# Altium PCB MPPT charger panel.PcbDoc
Units mm, origin at the board's own origin, x right, y up, seen from the top; angles counter-clockwise.
Board outline 76.45 x 131.7 mm, 2 copper layers (Top Layer, Bottom Layer); 9 components, 0 nets, 9 pads, 0 vias.
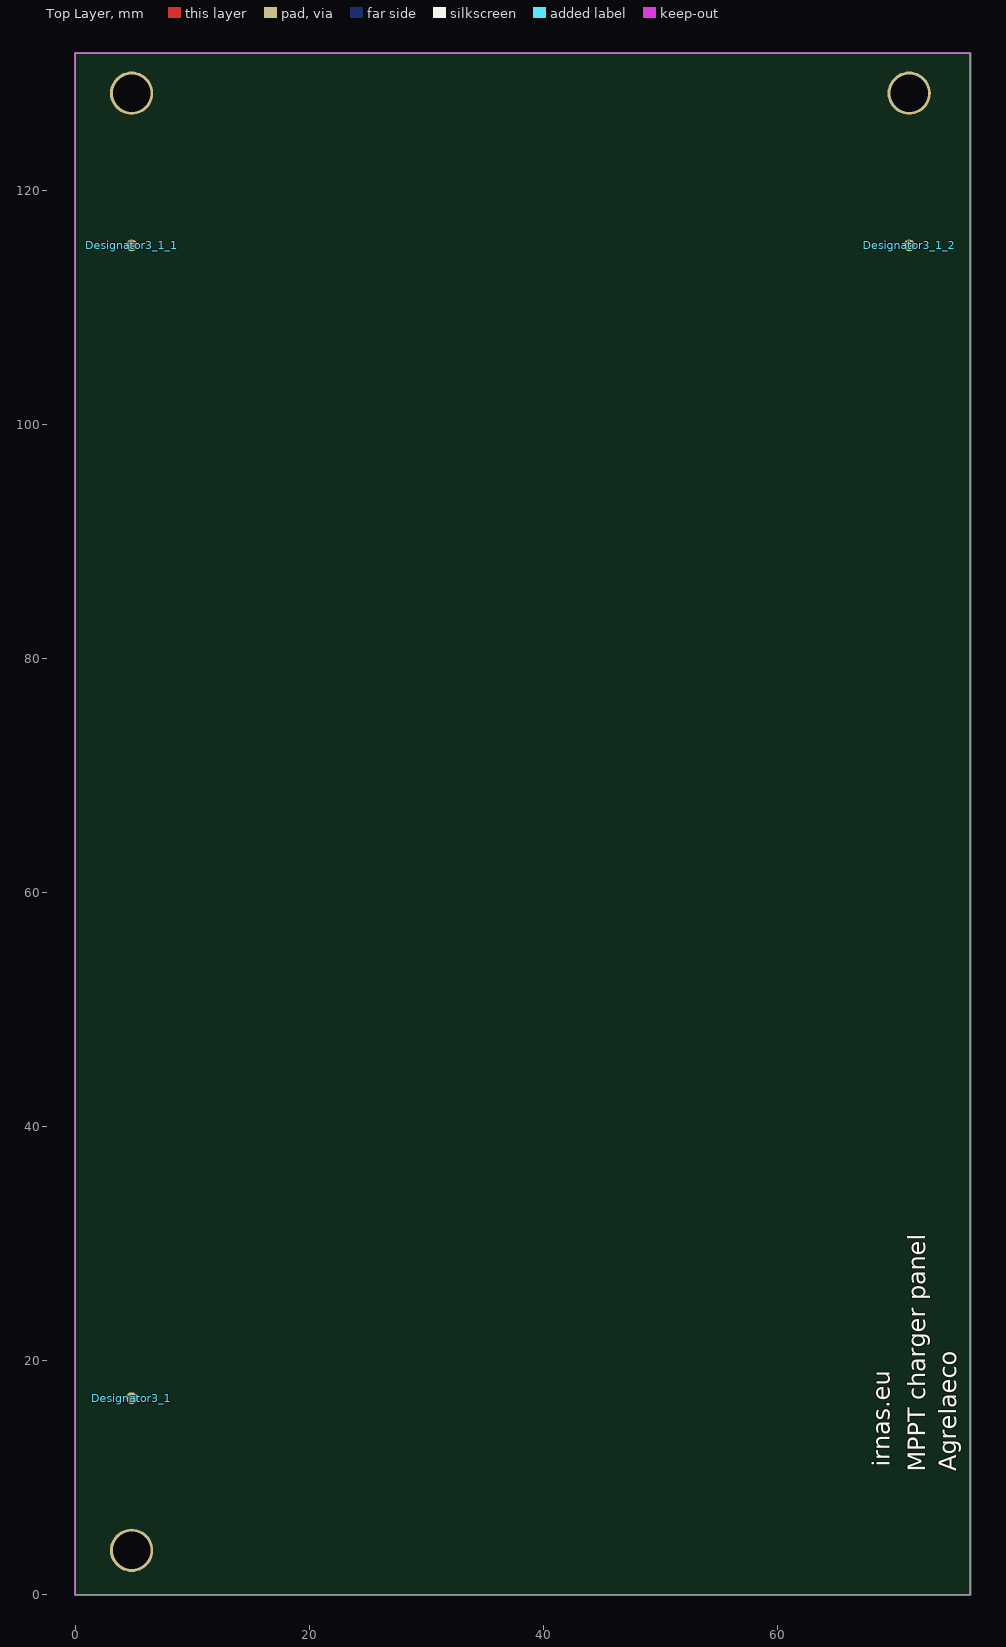
[diagram p0: Top Layer view]
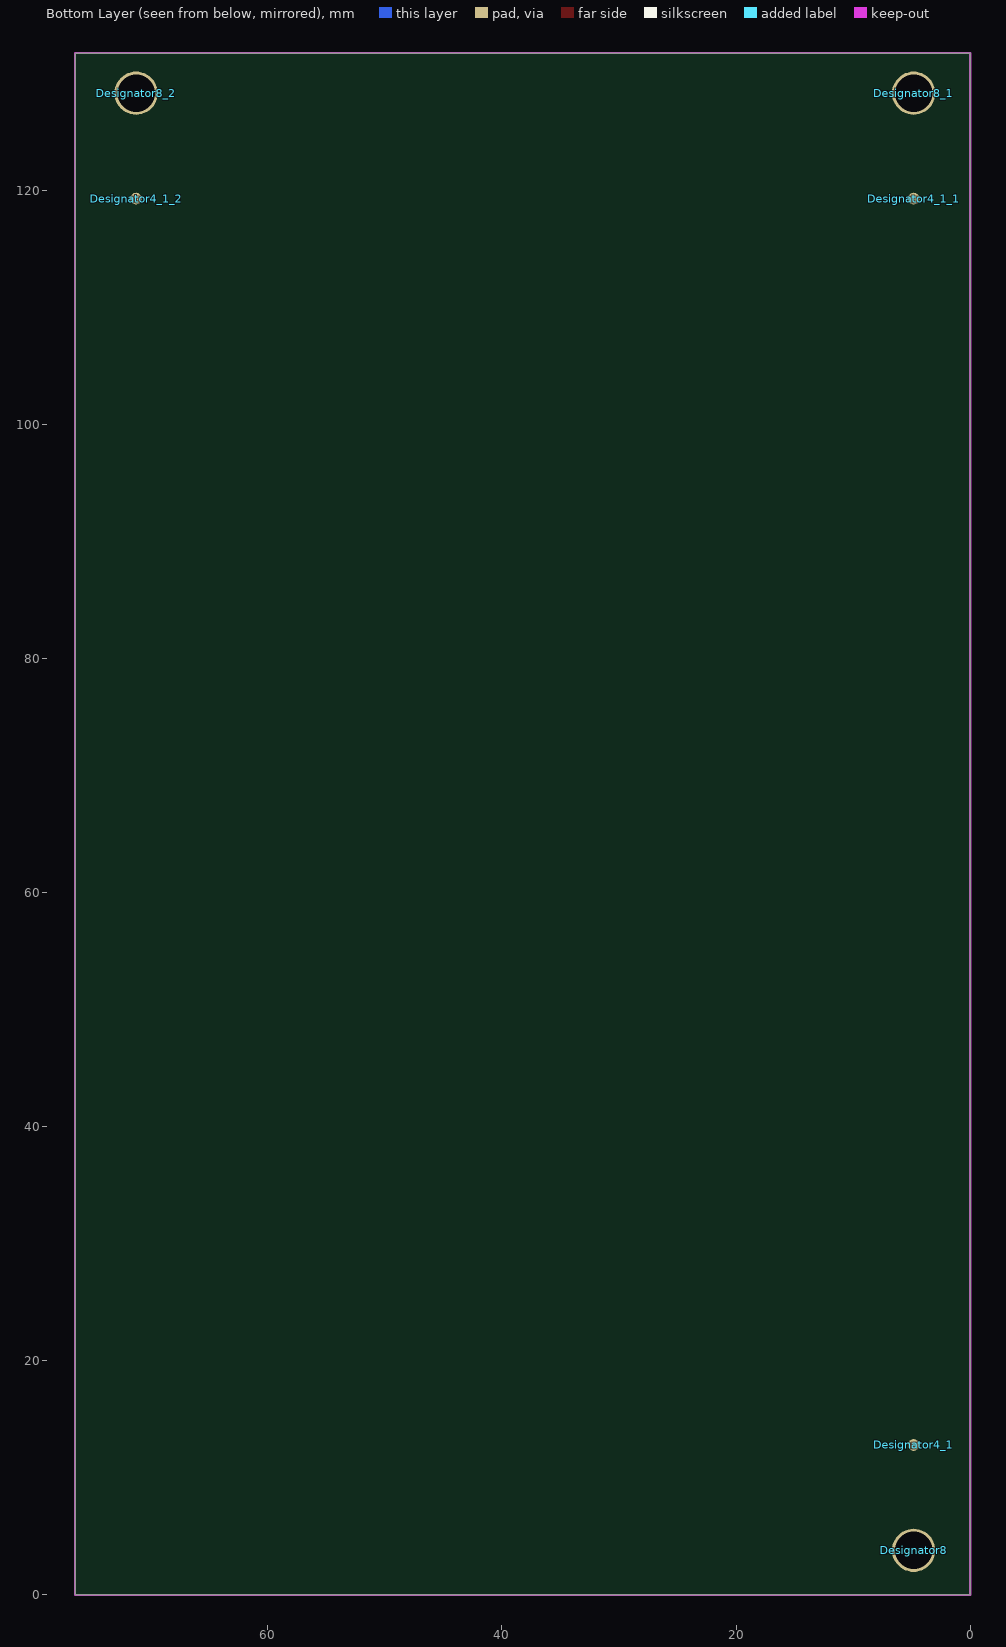
[diagram p1: Bottom Layer view, seen from below]

## Layer stack, top to bottom
Top Solder: solder mask 0.0102, Solder Resist, Dk 3.5
Top Layer: signal copper 0.0356
Dielectric 1: dielectric 0.32, FR-4, Dk 4.8
Bottom Layer: signal copper 0.0356
Bottom Solder: solder mask 0.0102, Solder Resist, Dk 3.5

## Board outline
0,0 76.454,0 76.454,131.699 0,131.699

## Design rules (kind name [scope] priority, off if disabled: settings)
Clearance [All] p1: gap=0.254 ignorepadtopadclearanceinfootprint=FALSE except(0: Arc-Hole Track-Hole SMDPad-Hole THPad-Hole Via-Hole Fill-Hole Poly-Hole Region-Hole Text-Hole)
PolygonConnect [All] p1: connectstyle=Relief reliefconductorwidth=0.254 reliefentries=4 polygonreliefangle="90 Angle" airgapwidth=0.254
RoutingVias [All] p1: holewidth=0.711 width=1.27 viastyle="Through Hole" minholewidth=0.711 minwidth=1.27 maxholewidth=0.711 maxwidth=1.27
SolderMaskExpansion [All] p1: expansion=0.102
Width [All] p1: maxlimit=0.254 minlimit=0.254 preferedwidth=0.254
30 further rules are at their usual default settings.

## Components (designator, comment, footprint, x,y, rotation, side; value= is the part's Value field where it differs from the comment)
Designator3_1 "Comment" FIDUCIAL 4.826,16.81 r270 top
Designator3_1_1 "Comment" FIDUCIAL 4.826,115.27 r90 top
Designator3_1_2 "Comment" FIDUCIAL 71.247,115.27 r90 top
Designator4_1 "Comment" FIDUCIAL 4.826,12.81 r90 bottom
Designator4_1_1 "Comment" FIDUCIAL 4.826,119.27 r270 bottom
Designator4_1_2 "Comment" FIDUCIAL 71.247,119.27 r270 bottom
Designator8 "Comment" HOLE 4.826,3.81 r270 bottom
Designator8_1 "Comment" HOLE 4.826,128.27 r90 bottom
Designator8_2 "Comment" HOLE 71.247,128.27 r90 bottom

## Footprints (in the part's own frame and the unit in brackets; to place one, negate y for a bottom-side part, rotate by r counter-clockwise, add the part's x,y. Pads: shape width x height; smd on the part's side, far side on the other; paste and mask are expansions set on the pad)
FIDUCIAL [mm]
  round 1 smd paste+0 mask+0.5: ""(0,0)
HOLE [mm]
  round 3.7 hole 3.2 unplated paste+0 mask+0: ""(0,0)

## Nets (pads, with @x,y where several pads share a name; then routed paths per layer and width w, separated by ;. In a path a pad name is that pad's centre, name@x,y a point inside that pad or via, vN(x,y) a via of type N, cw(c..) or ccw(c..) an arc to the next point about the centre after c; other vN are vias at no path point)
pads on no net: Designator3_1. Designator3_1_1. Designator3_1_2. Designator4_1. Designator4_1_1. Designator4_1_2. Designator8. Designator8_1. Designator8_2.

## Keep-outs
Keep-Out Layer:
  the board outline again, w0.2

## Silkscreen, mask and mechanical layers (free items; w line width, h text height)
Top Overlay:
  text "irnas.eu" at 69.576,10.954 h1.5 r90
  text "Agrelaeco" at 75.276,10.579 h1.5 r90
  text "MPPT charger panel" at 72.601,10.529 h1.5 r90
Mechanical 1:
  the board outline again, w0.2
V-groove:
  lines w0.2: -4.074,65.829 10.051,65.829 82.426,65.829 ; 9.826,-12.671 9.826,137.204 ; 28.701,-12.671 28.701,137.204 ; 47.651,-12.446 47.651,137.204 ; 66.526,-12.671 66.526,137.204
  text "V-goorve" at 30.451,139.129 h1.5 r90
  text "V-goorve" at 49.126,138.829 h1.5 r90
  text "V-goorve" at 67.551,138.529 h1.5 r90
  text "V-goorve" at 11.376,138.354 h1.5 r90
  text "V-goorve" at -16.724,64.579 h1.5
  text "V-goorve" at 83.126,64.179 h1.5
  text "V-goorve" at 68.326,-25.146 h1.5 r90
  text "V-goorve" at 11.126,-25.271 h1.5 r90
  text "V-goorve" at 29.526,-25.721 h1.5 r90
  text "V-goorve" at 48.651,-25.721 h1.5 r90

## Dimensions
76.454,0 to 0,0 on Mechanical 1
76.454,131.699 to 76.454,0 on Mechanical 1

## Panel: embedded boards
"MPPT charger.PcbDoc" at 10.033,0, 2 rows x 3 columns, spacing 66.078 x 18.94, rotation 0